# Altium PCB VerticalFET.PcbDoc
Units mil, origin at the board's own origin, x right, y up, seen from the top; angles counter-clockwise.
Board outline 556.88 x 825 mil, 4 copper layers (L1, GND, PWR, L2), stack 23.756 mil thick; 18 components, 10 nets, 63 pads, 39 vias.
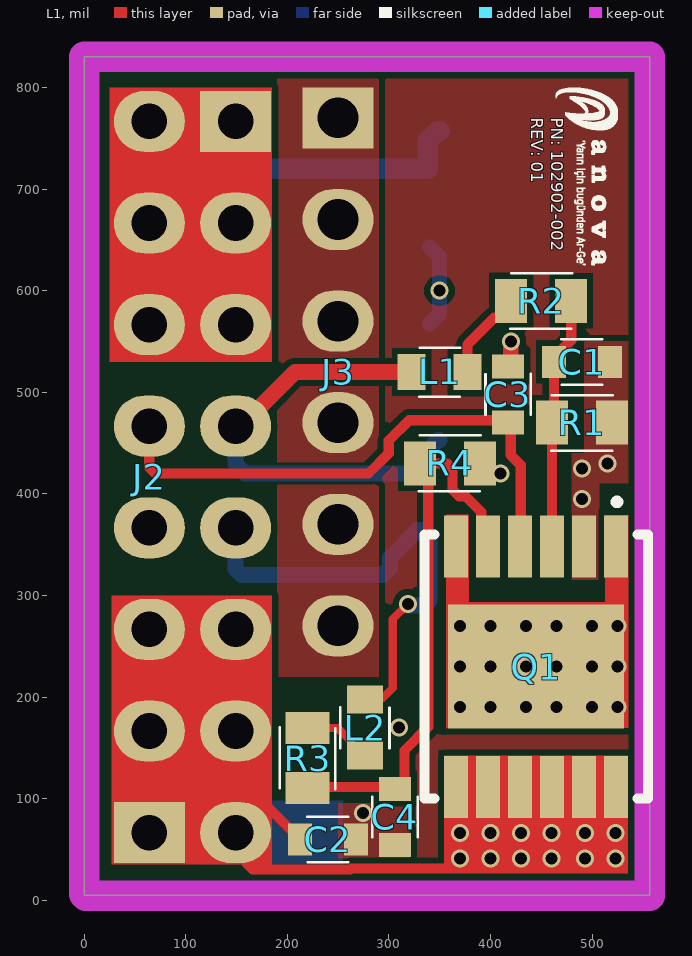
[diagram p0: L1 view]
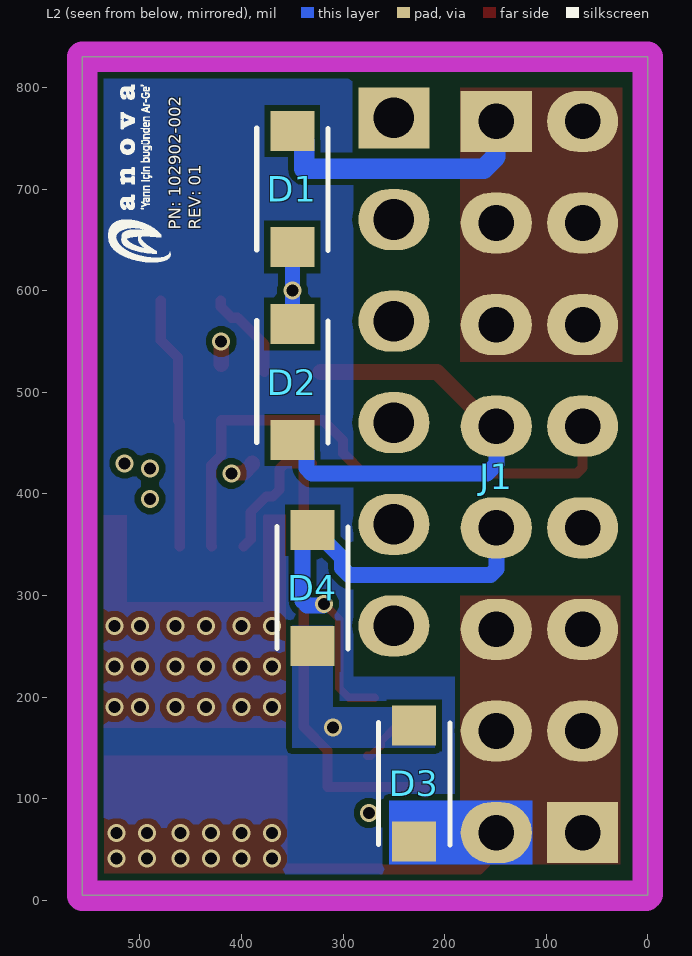
[diagram p1: L2 view, seen from below]
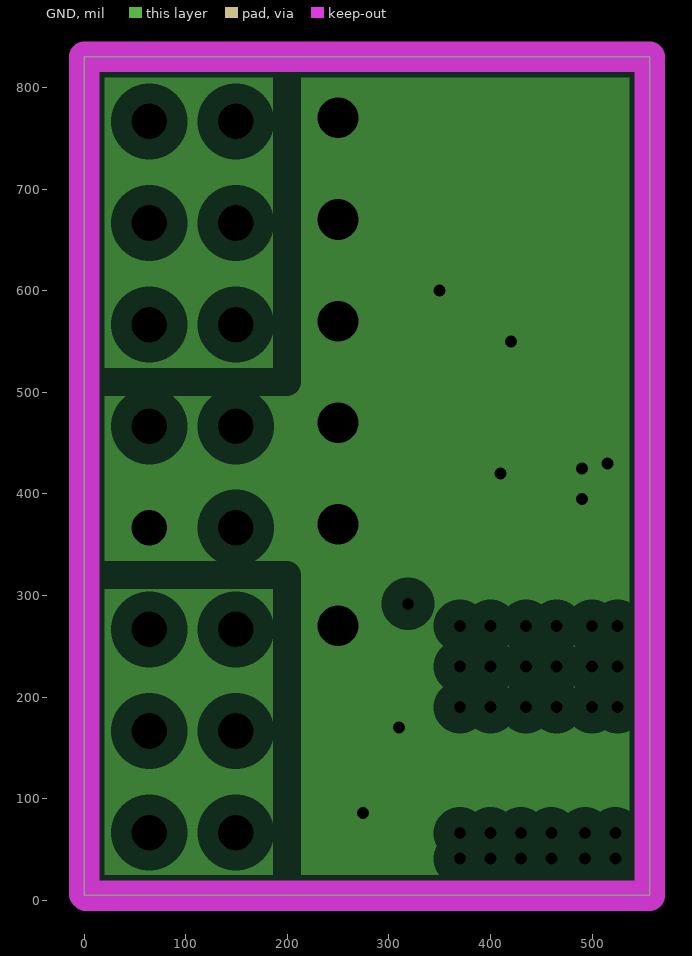
[diagram p2: GND, clearances drawn from the general rule]
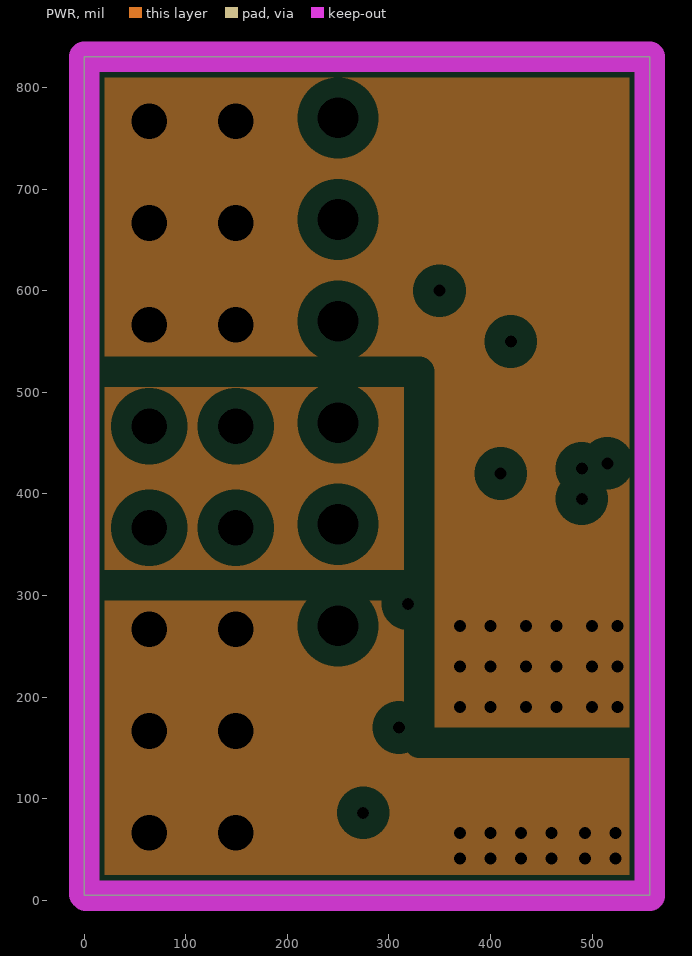
[diagram p3: PWR, clearances drawn from the general rule]
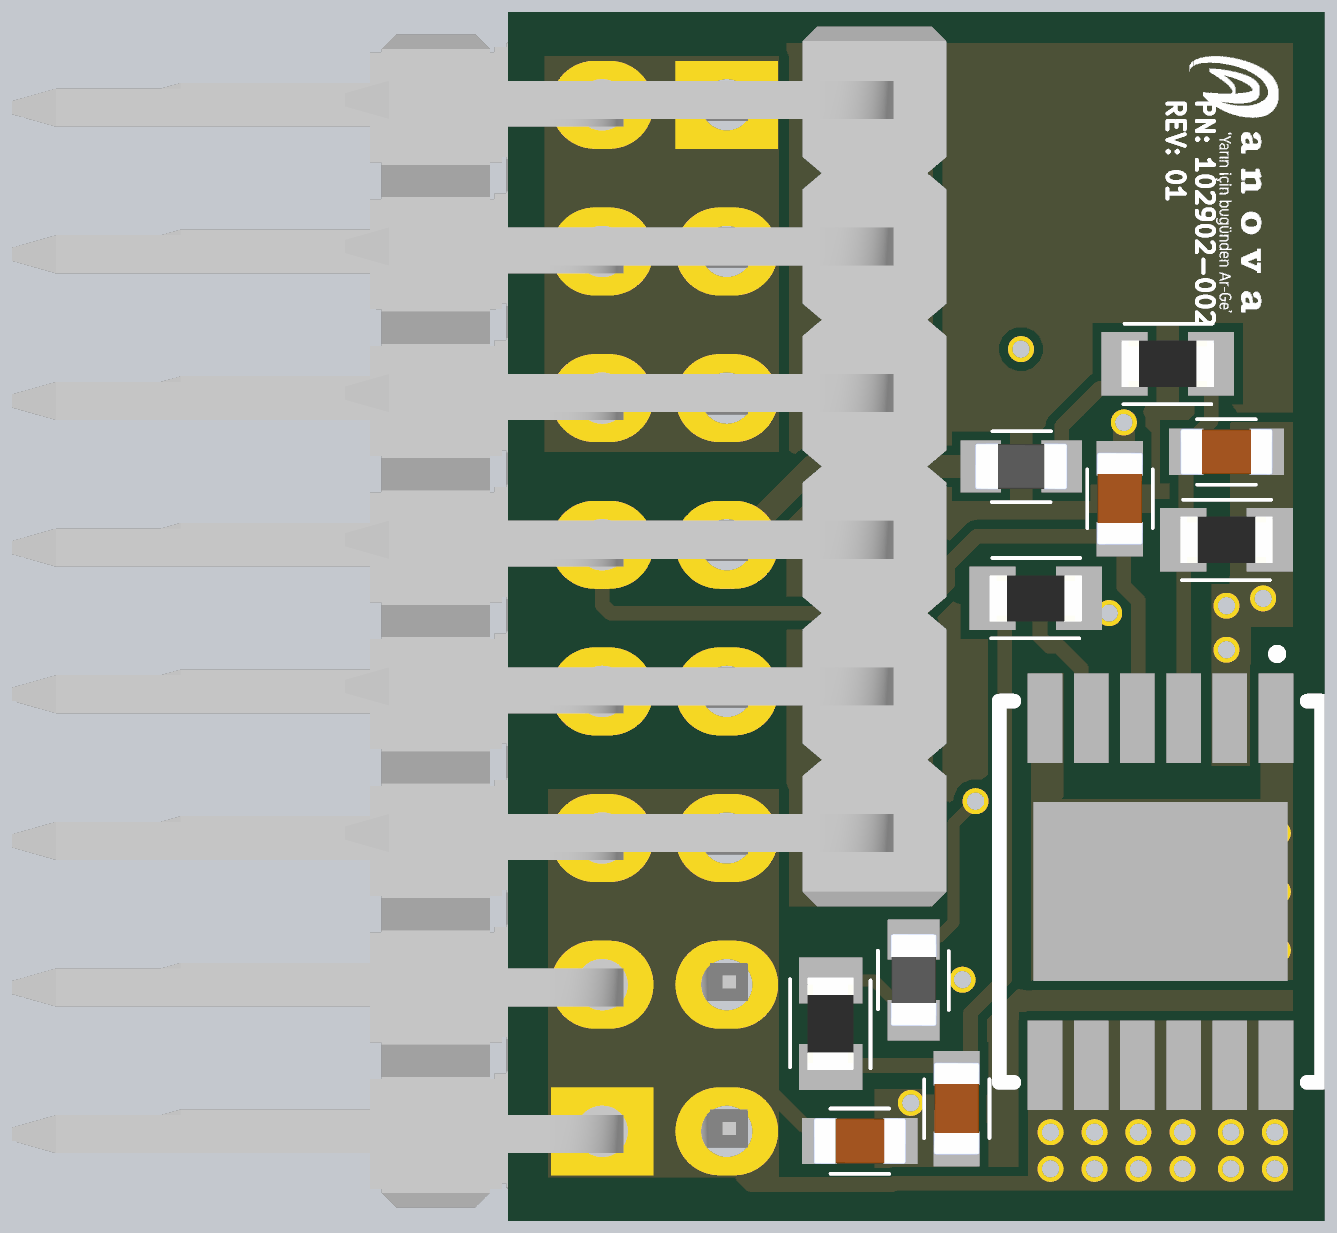
[diagram p4: 3D render of the assembled board from above, using the file's embedded part models]
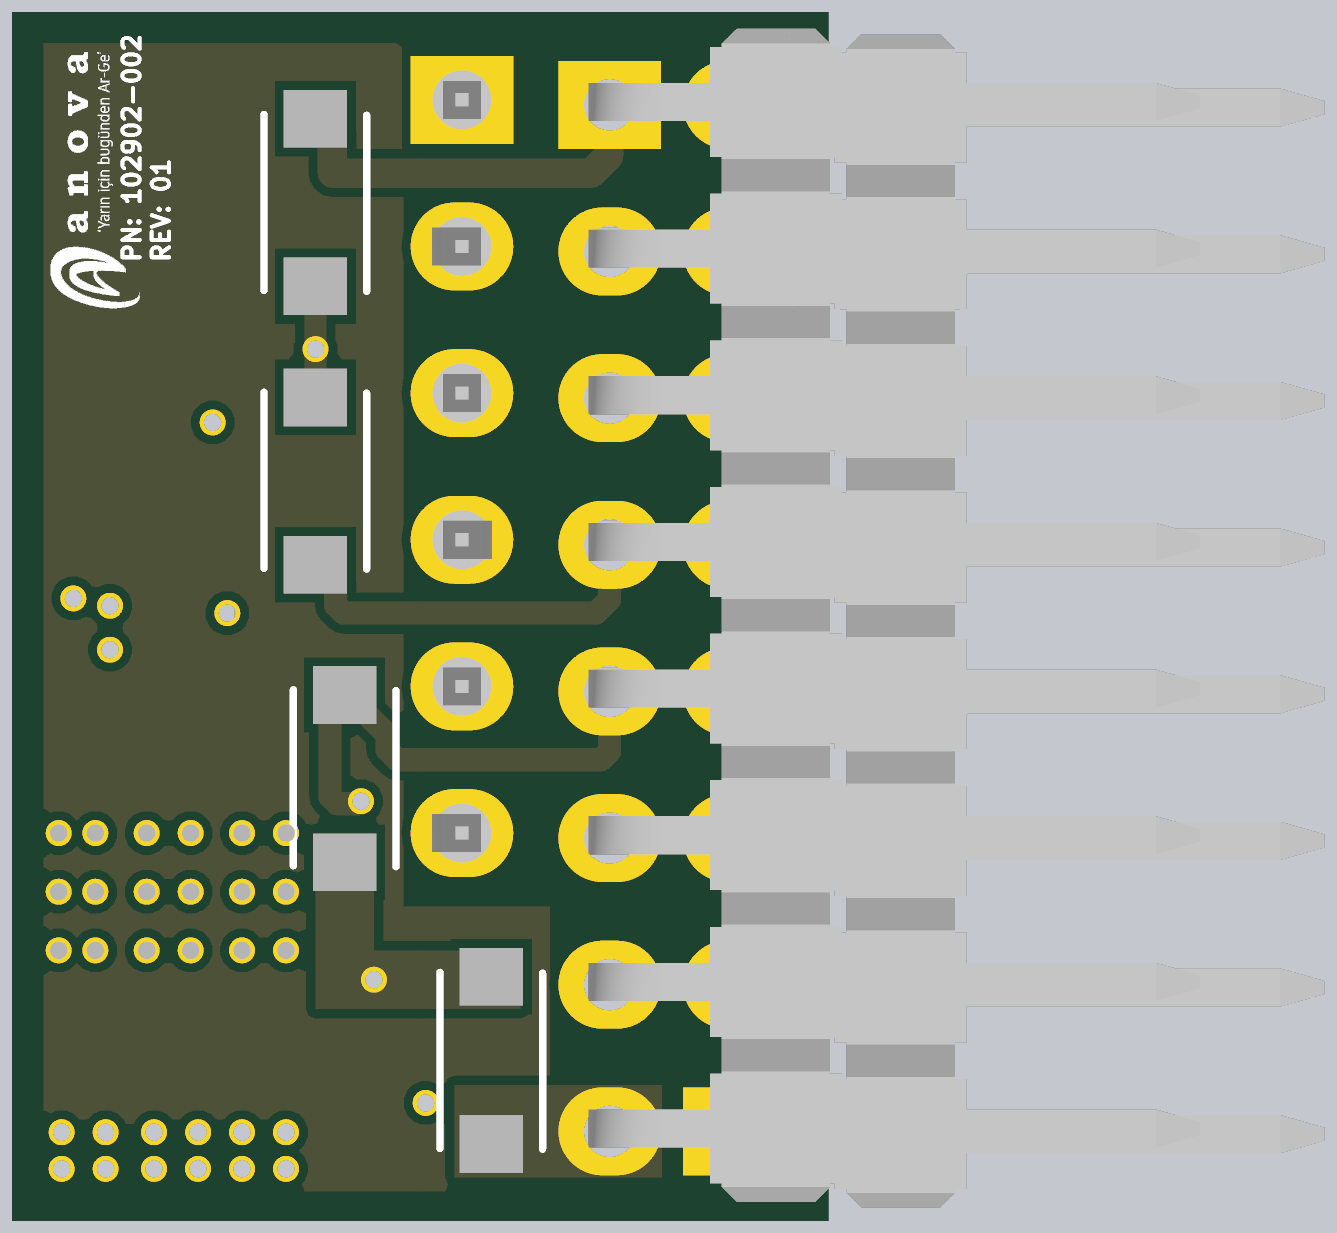
[diagram p5: 3D render of the assembled board from below, using the file's embedded part models]

## Layer stack, top to bottom
Top Solder: solder mask 0.4, Solder Resist, Dk 3.5
L1: signal copper 1.4
Prepreg1: prepreg 2.8, PP-006, Dk 4.1
GND: plane copper 1.378, net GND
Dielectric 1: dielectric 12.6, FR-4, Dk 4.8
PWR: plane copper 1.378, net (Multiple Nets)
Dielectric 3: prepreg 2.8, PP-006, Dk 4.1
L2: signal copper 1.4
Bottom Solder: solder mask 0.4, Solder Resist, Dk 3.5

## Board outline
0,5 556.88,5 556.88,830 0,830

## Design rules (kind name [scope] priority, off if disabled: settings)
Clearance [All] p1: gap=6 ignorepadtopadclearanceinfootprint=FALSE
ComponentClearance ComponentClearance_1 [InComponent('J1') vs InComponent('J2')] p1: gap=-2 collisioncheckmode=3 verticalgap=100000 showdistances=FALSE
ComponentClearance [All] p2: gap=10 collisioncheckmode=3 verticalgap=10 showdistances=FALSE
DiffPairsRouting [All] p1: maxlimit=10 minlimit=10 mostfreqgap=10 toplayer_minwidth=6 toplayer_maxwidth=15 toplayer_prefwidth=15 bottomlayer_minwidth=6 bottomlayer_maxwidth=15 bottomlayer_prefwidth=15 maxuncoupledlength=500
HoleSize [All] p1: absolutevalues=TRUE maxlimit=100 minlimit=0 maxpercent=80.000 minpercent=20.000
MinimumSolderMaskSliver [All] p1: minsoldermaskwidth=0
PlaneClearance [All] p1: clearance=20
PlaneConnect [All] p1: planeconnectstyle=Direct reliefexpansion=20 reliefentries=4 reliefconductorwidth=10 reliefairgap=10
PolygonConnect [All] p1: connectstyle=Direct reliefconductorwidth=10 reliefentries=4 polygonreliefangle="90 Angle" airgapwidth=10
RoutingVias [All] p1: holewidth=11.81 width=17.72 viastyle="Through Hole" minholewidth=11.81 minwidth=17.72 maxholewidth=11.81 maxwidth=17.72
SilkToSilkClearance [All] p1: silktosilkclearance=1
SilkToSolderMaskClearance [IsPad] p1: minsilkscreentomaskgap=2 clearancetoexposedcopper=TRUE
SolderMaskExpansion [All] p1: expansion=0 istentingtop=FALSE
UnRoutedNet [All] p1: checkbadconnections=TRUE
Width [All] p1: maxlimit=30 minlimit=7 preferedwidth=8 minimp=50.000000 maximp=50.000000 favimp=50.000000
21 further rules are at their usual default settings.

## Components (designator, comment, footprint, x,y, rotation, side; value= is the part's Value field where it differs from the comment)
C1 "100n" CAP-0603 490,530 r0 top
C2 "100n" CAP-0603 240,60 r0 top
C3 "100n" CAP-0603 417.26,498.02 r90 top
C4 "100n" CAP-0603 305.97,82.06 r90 top
D1 "TVS-DIODE-48.4VC" SOD-123FL 350,700 r270 bottom
D2 "TVS-DIODE-5VC" SOD-123FL 350,510 r90 bottom
D3 "TVS-DIODE-48.4VC" SOD-123FL 230,115 r270 bottom
D4 "TVS-DIODE-5VC" SOD-123FL 330,307.09 r90 bottom
J1 "HEADER-1" HEEADER-1 149.25,416.59 r270 bottom
J2 "HEADER-1" HEEADER-1 64.25,416.59 r90 top
J3 "022287060" 022287060 250,520 r270 top
L1 "Ferrite-Bead" FERITTE-BEAD 350,520 r0 top
L2 "Ferrite-Bead" FERITTE-BEAD 276.67,169.83 r270 top
Q1 "VN5016AJ-E" POWERSSO-12 445,230 r180 top
R1 "10K" RES-0603 490,470 r0 top
R2 "1K" RES-0603 450,590 r0 top
R3 "1K" RES-0603 220,140 r270 top
R4 "10K" RES-0603 360,430 r180 top

## Footprints (in the part's own frame and the unit in brackets; to place one, negate y for a bottom-side part, rotate by r counter-clockwise, add the part's x,y. Pads: shape width x height; smd on the part's side, far side on the other; paste and mask are expansions set on the pad)
022287060 [mil] "j?"
  rect 60x70 hole 40: 1(-250,0)
  oval 60x70 hole 40: 2(-150,0) 3(-50,0) 4(50,0) 5(150,0) 6(250,0)
  body extent -300,-361 300,49, height 174
CAP-0603 [mm] "10uF"
  rect 0.6x0.8 smd: 1(-0.7,0) 2(0.7,0)
  silkscreen extent -0.51,-0.57 0.51,0.56, body extent -0.8,-0.4 0.8,0.4, height 1.01
FERITTE-BEAD [mm]
  rect 0.7x0.9 smd: 1(-0.7,0) 2(0.7,0)
  silkscreen extent -0.51,-0.62 0.52,0.61, body extent -0.8,-0.4 0.8,0.4, height 0.95
HEEADER-1 [mil]
  rect 60x70 hole 35: 1(-350,0)
  oval 60x70 hole 35: 2(-250,0) 3(-150,0) 4(-50,0) 5(50,0) 6(150,0) 7(250,0) 8(350,0)
  body extent -402,-15 398,402, height 128
POWERSSO-12 [mm]
  rect 4.4x3.1 smd: 0(0,0)
  rect 0.6x1.55 smd: 1(-2,-3.007) 2(-1.2,-3.007) 3(-0.4,-3.007) 4(0.4,-3.007) 5(1.2,-3.007) 6(2,-3.007) 7(2,3.007) 8(1.2,3.007) 9(0.4,3.007) 10(-0.4,3.007) 11(-1.2,3.007) 12(-2,3.007)
  silkscreen extent -2.79,-4.15 2.79,3.3, body extent -2.5,-3.1 2.5,3.1, height 1.64
RES-0603 [mm] "Resistors"
  rect 0.8x1.1 smd: 1(-0.75,0) 2(0.75,0)
  silkscreen extent -0.77,-0.7 0.77,0.69, body extent -0.8,-0.4 0.8,0.4, height 0.46
SOD-123FL [mm]
  rect 1x1.1 smd: 1(-1.45,0) 2(1.45,0)
  silkscreen extent -1.52,-0.89 1.54,0.89, body extent -1.79,-0.82 1.79,0.83, height 0.95

## Part data
C1 C2 C3 C4: library part CAP-100N-0603, "Cap Ceramic 0.1uF 50V X7R 10% SMD 0603 125C Paper T/R", Capacitance=100nF, Case Code (Metric)=1608, Case Code (Imperial)=0603, Dielectric=X7R, Manufacturer=Murata, Manufacturer Part Number=GCM188R71H104KA57D, Max Operating Temperature=125°C, Min Operating Temperature=-55°C, Package Quantity=1, Ratings=AEC-Q200, Supplier Part Number 1=490-4779-1-ND, Tolerance=10%, Voltage=50V, Case/Package=0603, Category="Ceramic Capacitors", ComponentLink1Description=https://datasheet.ciiva.com/16624/product-16624562.pdf?src-supplier=Avnet+Europe, ComponentLink1URL=https://datasheet.ciiva.com/16624/product-16624562.pdf?src-supplier=Avnet+Europe, ComponentLink2Description=https://datasheet.ciiva.com/133/product-133574.pdf?src-supplier=Digi-Key, ComponentLink2URL=https://datasheet.ciiva.com/133/product-133574.pdf?src-supplier=Digi-Key, ComponentLink3Description=https://datasheet.ciiva.com/133/product-133575.pdf?src-supplier=Digi-Key, ComponentLink3URL=https://datasheet.ciiva.com/133/product-133575.pdf?src-supplier=Digi-Key, ComponentLink4Description=https://datasheet.ciiva.com/18183/getdatasheetpartid-98693-18183626.pdf?src-supplier=Verical, ComponentLink4URL=https://datasheet.ciiva.com/18183/getdatasheetpartid-98693-18183626.pdf?src-supplier=Verical, ComponentLink5Description=https://datasheet.ciiva.com/11786/0900766b80ef92d0-11786863.pdf?src-supplier=RSComponents, ComponentLink5URL=https://datasheet.ciiva.com/11786/0900766b80ef92d0-11786863.pdf?src-supplier=RSComponents, ComponentLink6Description=https://datasheet.ciiva.com/133/product-133573.pdf?src-supplier=Digi-Key, ComponentLink6URL=https://datasheet.ciiva.com/133/product-133573.pdf?src-supplier=Digi-Key, ComponentLink7Description=https://datasheet.ciiva.com/2989/product-2989242.pdf?src-supplier=Avnet, ComponentLink7URL=https://datasheet.ciiva.com/2989/product-2989242.pdf?src-supplier=Avnet, ComponentLink8Description=https://datasheet.ciiva.com/16497/product-16497247.pdf?src-supplier=Future+Electronics, ComponentLink8URL=https://datasheet.ciiva.com/16497/product-16497247.pdf?src-supplier=Future+Electronics, Construction=Flat, Depth=0.8mm, Height=0.8mm, Lead Free="Lead Free", Length=1.6mm, Mount="Surface Mount", Packaging="Tape and Reel", Pricing 1="1=0.11000, 10=0.07900, 50=0.04300, 100=0.03510, 500=0.02510, 1000=0.01972 (USD)", Radiation Hardening=No, REACH SVHC="No SVHC", RoHS=Yes, RoHS Compliant=Yes, Series=GCM, Stock 1=2424921, Supplier 1=Digi-Key, Termination=SMD/SMT, Thickness=0.035inch, Voltage Rating=50V, Voltage Rating (DC)=50V, Width=0.031inch
D1 D3: "SMF4L30CA", Manufacturer=Littelfuse, Supplier Part Number 1=18-SMF4L30CACT-ND, Category="TVS Diodes", Manufacturer Part Number=SMF4L30CA, Pricing 1="1=0.46000, 10=0.37300, 100=0.25400, 500=0.19052, 1000=0.14288 (USD)", RoHS=Yes, Stock 1=1501, Supplier 1=Digi-Key
D2 D4: "PESD2V8R1BSF - Ultra low capacitance bidirectional ESD protection diode", Manufacturer=Nexperia, Manufacturer Part Number=PESD2V8R1BSFYL, Supplier Part Number 1=1727-PESD2V8R1BSFYLCT-ND, Category="TVS Diodes", Pricing 1="1=0.44000, 10=0.32400, 100=0.18340, 500=0.12144, 1000=0.09310, 2000=0.08096 (USD)", RoHS=No, Stock 1=12322, Supplier 1=Digi-Key
J1 J2: "CONN HEADER R/A 8POS 2.54MM", Color=Black, Contact Resistance=20mR, Manufacturer=Molex, Manufacturer Part Number=0022288080, Max Operating Temperature=75°C, Max Voltage Rating (AC)=250V, Min Operating Temperature=0°C, Package Quantity=1, Supplier Part Number 1=WM50013-08-ND, Category="Headers and Wire Housings", ComponentLink1Description=https://datasheet.ciiva.com/6839/022289022-sd-6839452.pdf?src-supplier=Digi-Key, ComponentLink1URL=https://datasheet.ciiva.com/6839/022289022-sd-6839452.pdf?src-supplier=Digi-Key, ComponentLink2Description=https://datasheet.ciiva.com/10085/0022288080-pcb-headers-10085395.pdf?src-supplier=Avnet, ComponentLink2URL=https://datasheet.ciiva.com/10085/0022288080-pcb-headers-10085395.pdf?src-supplier=Avnet, ComponentLink3Description=https://datasheet.ciiva.com/6889/022288080-sd-6889612.pdf?src-supplier=Digi-Key, ComponentLink3URL=https://datasheet.ciiva.com/6889/022288080-sd-6889612.pdf?src-supplier=Digi-Key, Connector Type="Male Pin", Contact Material=Brass, Contact Mating Length=0.244inch, Contact Plating=Tin, Contact Type="Male Pin", Depth=10.27mm, Gender=Male, Housing Color=Black, Housing Material=Thermoplastic, Length=20.32mm, Mount="Through Hole", Number of Contacts=8, Number of Positions=8, Number of Rows=1, Orientation="Right Angle", Packaging=Bulk, Pitch=2.54mm, Pricing 1="1=0.49000, 10=0.41700, 100=0.32420 (USD)", RoHS=Yes, RoHS Compliant=Yes, Series="KK® 42377", Stock 1=62, Supplier 1=Digi-Key, Termination=Solder
J3: "HEADER, 6WAY", Current Rating=4A, Flammability Rating="UL94 V-0", Manufacturer=Molex, Manufacturer Part Number=22-28-7060, Package Quantity=1500, Voltage Rating=250V, Category="Headers and Wire Housings", ComponentLink1Description=https://datasheet.ciiva.com/13555/0022287060-pcb-headers-158998-13555865.pdf?src-supplier=Mouser, ComponentLink1URL=https://datasheet.ciiva.com/13555/0022287060-pcb-headers-158998-13555865.pdf?src-supplier=Mouser, Contact Material=Brass, Contact Plating=Tin, ELV=Compliant, Gender=Male, Glow Wire Compliant=Non-compliant, Housing Material=Thermoplastic, Material=Brass, Number of Circuits=6, Number of Contacts=6, Number of Positions=6, Number of Rows=1, Orientation="Right Angle", Packaging=Bulk, Pitch=2.54mm, Pricing 1="12000=0.25530, 13000=0.25160, 25000=0.24388, 60000=0.24024, 120000=0.23296, 600000=0.22932, 1200000=0.22659 (USD)", RoHS=Yes, RoHS Compliant=Yes, Series=42376, Stock 1=3700, Supplier 1=Avnet, Supplier Part Number 1=22-28-7060, Termination="Through Hole"
L1 L2: "FERRITE BEAD 1 KOHM 0603 1LN", Case Code (Metric)=1608, Case Code (Imperial)=0603, Current Rating=200mA, DC Resistance (DCR)=800mR, Manufacturer=Murata, Manufacturer Part Number=BLM18RK102SN1D, Max Operating Temperature=125°C, Min Operating Temperature=-55°C, Package Quantity=1, Supplier Part Number 1=490-5228-1-ND, Test Frequency=100MHz, Tolerance=25%, Case/Package=0603, Category="Ferrite Beads and Chips", ComponentLink1Description=https://datasheet.ciiva.com/6212/l0110s0100blm18r-6212512.pdf?src-supplier=Digi-Key, ComponentLink1URL=https://datasheet.ciiva.com/6212/l0110s0100blm18r-6212512.pdf?src-supplier=Digi-Key, ComponentLink2Description=https://datasheet.ciiva.com/19460/1845081-19460235.pdf?src-supplier=Jameco, ComponentLink2URL=https://datasheet.ciiva.com/19460/1845081-19460235.pdf?src-supplier=Jameco, ComponentLink3Description=https://datasheet.ciiva.com/41449/001171720-da-01-en-chip-drossel0603-1000r-200ma-1-6x0-8mm-41449349.pdf?src-supplier=Conrad, ComponentLink3URL=https://datasheet.ciiva.com/41449/001171720-da-01-en-chip-drossel0603-1000r-200ma-1-6x0-8mm-41449349.pdf?src-supplier=Conrad, ComponentLink4Description=https://datasheet.ciiva.com/41449/001172307-da-01-en-drossel-0603-1000r-1-6x0-8mm-4000st-41449670.pdf?src-supplier=Conrad, ComponentLink4URL=https://datasheet.ciiva.com/41449/001172307-da-01-en-drossel-0603-1000r-1-6x0-8mm-4000st-41449670.pdf?src-supplier=Conrad, ComponentLink5Description=https://datasheet.ciiva.com/3067/c31e-3067187.pdf?src-supplier=Avnet, ComponentLink5URL=https://datasheet.ciiva.com/3067/c31e-3067187.pdf?src-supplier=Avnet, ComponentLink6Description=https://datasheet.ciiva.com/3067/c31e-3067129.pdf?src-supplier=Avnet, ComponentLink6URL=https://datasheet.ciiva.com/3067/c31e-3067129.pdf?src-supplier=Avnet, ComponentLink7Description=https://datasheet.ciiva.com/8021/5149-8021501.pdf?src-supplier=Element14, ComponentLink7URL=https://datasheet.ciiva.com/8021/5149-8021501.pdf?src-supplier=Element14, ComponentLink8Description=https://datasheet.ciiva.com/6212/l0110e-6212510.pdf?src-supplier=Digi-Key, ComponentLink8URL=https://datasheet.ciiva.com/6212/l0110e-6212510.pdf?src-supplier=Digi-Key, ComponentLink9Description=https://datasheet.ciiva.com/8021/5149-8021502.pdf?src-supplier=Element14, ComponentLink9URL=https://datasheet.ciiva.com/8021/5149-8021502.pdf?src-supplier=Element14, ComponentLink10Description=https://datasheet.ciiva.com/6212/l0110e-6212511.pdf?src-supplier=Digi-Key, ComponentLink10URL=https://datasheet.ciiva.com/6212/l0110e-6212511.pdf?src-supplier=Digi-Key, Contact Plating=Tin,Matte, Core Material=Ferrite, DC Resistance-Max=800mR, Depth=0.8mm, Height=0.8mm, Lead Free="Lead Free", Length=1.6mm, Material=Steel,Ferrite, Max Current Rating=200mA, Max DC Current=200mA, Number of Circuits=1, Number of Lines=1, Number of Pins=2, Packaging="Tape and Reel", Pricing 1="1=0.10000, 10=0.08200, 25=0.07440, 50=0.05440, 100=0.04700, 250=0.03712, 500=0.03136, 1000=0.02640 (USD)", REACH SVHC="No SVHC", Resistance=800mR, RoHS=Yes, RoHS Compliant=Yes, Series=BLM18R, Shielding=Unshielded, Stock 1=68861, Supplier 1=Digi-Key, Termination=Flat, Width=0.8mm, Impedance=1kR
Q1: "STMicroelevtronics_VIPower_MO_5"
R1 R4: library part RES-10K-0603, "Resistors-10KOhm"
R2 R3: library part RES-1K-0603, "RES SMD 1K OHM 0.5% 1/10W 0603", Case/Package=0603, Manufacturer="Stackpole Electronics", Manufacturer Part Number=RNCF0603DTE1K00, Max Operating Temperature=155°C, Max Power Dissipation=100mW, Min Operating Temperature=-55°C, Package Quantity=5000, Resistance=1kR, Resistor Type="Thin Film", Supplier Part Number 1=RNCF0603DTE1K00CT-ND, Temperature Coefficient=25ppm/°C, Tolerance=0.5%, Category="Chip SMD Resistors", ComponentLink1Description=https://www.seielect.com/Catalog/SEI-rncf.pdf?src-supplier=Avnet, ComponentLink1URL=https://www.seielect.com/Catalog/SEI-rncf.pdf?src-supplier=Avnet, ComponentLink2Description=https://www.seielect.com/Catalog/SEI-RNCF.pdf?src-supplier=Digi-Key, ComponentLink2URL=https://www.seielect.com/Catalog/SEI-RNCF.pdf?src-supplier=Digi-Key, Contact Plating=Tin,Matte, Features="Moisture Resistant", Height=0.022inch, Length=0.063inch, Mount="Surface Mount", Number of Terminations=2, Packaging="Tape and Reel", Pricing 1="1=0.13000, 10=0.11000, 25=0.08000, 50=0.05800, 100=0.04300, 250=0.03300, 500=0.02600, 1000=0.01800 (USD)", Radiation Hardening=No, RoHS=Yes, RoHS Compliant=Yes, Series=RNCF, Stock 1=522, Supplier 1=Digi-Key, Width=0.031inch

## Via types
v1: diameter 17.72, hole 11.81, L1 to L2, 39 vias

## Nets (pads, with @x,y where several pads share a name; then routed paths per layer and width w, separated by ;. In a path a pad name is that pad's centre, name@x,y a point inside that pad or via, vN(x,y) a via of type N, cw(c..) or ccw(c..) an arc to the next point about the centre after c; other vN are vias at no path point)
CS_DIS: D4.2 J1.5 L2.1 | length 487.6
  L1 w7.99: L2.1@268.85,199.26 294.17,199.26 303.85,208.94 303.85,276.7 v1(318.85,291.7)
  L1 w10: J1.5 J1.5@165.1,366.59
  L2 w15.75: J1.5 149.25,325.86 155.11,320 294.14,320 301.21,327.07 301.21,337.35 328.03,364.17 D4.2 340,354.17 340,294.68 335.32,290 v1@320,290
CURR_SENS: C3.1 J2.5 Q1.4 | length 556.3
  L1 w10: J2.5 64.25,425.86 70.11,420 280,420 299.98,439.98 299.98,452.46 319.96,472.44 420,472.44 420,438.08 429.86,428.23 429.86,348.99 Q1.4
GND: C1.2 C2.2 C3.2 C4.1 D1.2 D2.2 D3.1 D4.1 J2.4 J3.1 J3.2 J3.3 J3.4 J3.5 J3.6 Q1.2 R1.2 R4.1 | length 141.9
  L1 w10: J2.4@50,365 J2.4@55,365
  L1 w15: R4.1 389.53,428.77 397.78,420.52 409.48,420.52 v1(410,420) ; C3.2@420,527.56 v1(420,550)
  L2 w10: J2.4@50,365 J2.4@55,365
  L2 w15: D2.2@340,567.09 349.93,577.02 349.93,599.93 v1(349.87,600) ; D1.2@340,642.91 349.93,632.98 349.93,600.07 v1@350,600
  other v1: 274.75,85.97 310,170 490,395 490,425 515,430
INP: D2.1 J1.4 L1.1 | length 460.1
  L1 w15.75: J1.4 154.25,466.59 207.66,520 L1.1
  L2 w15.75: J1.4 149.25,429.22 158.48,420 330.78,420 336.22,425.45 336.22,441.1 348.03,452.91 D2.1
NetC1_1: C1.1 Q1.3 R1.1 R2.2 | length 249.6
  L1 w10: Q1.3 460.75,469.72 R1.1 462.44,471.97 C1.1 462.44,533.94 479.53,551.02 R2.2
NetC4_2: C4.2 Q1.5 R3.2 R4.2 | length 556.2
  L1 w10: R3.2 221.03,111.5 315.43,111.5 315.43,147.35 338.71,170.62 338.71,421.77 R4.2 356.92,430 362.78,424.14 362.78,403.79 369.22,397.35 375.69,397.35 390.94,382.09 390.94,355.2 Q1.5
NetL1_2: L1.2 R2.1 | length 91.2
  L1 w10: L1.2 377.56,547.09 403.82,573.35 409.72,573.35 420.47,584.09 R2.1
NetL2_2: L2.2 R3.1 | length 70.3
  L1 w7.99: R3.1 249.42,169.53 262.95,155.99 262.95,152.05 272.74,142.27 L2.2
VIN: D1.1 J1.1 J1.2 J1.3 J2.6 J2.7 J2.8 Q1.0 Q1.1 Q1.6 | length 271.4
  L2 w20: J1.1 150,765.85 150,731.72 161.72,720 338.28,720 338.35,720.06 338.35,747.4 348.03,757.09 D1.1
  other v1: 370,190 400,190 435,190 465,190 500,190 525,190 370,230 400,230 435,230 465,230 500,230 525,230 370,270 400,270 435,270 465,270 500,270 525,270
VOUT: C2.1 D3.2 J1.6 J1.7 J1.8 J2.1 J2.2 J2.3 Q1.7 Q1.8 Q1.9 Q1.10 Q1.11 Q1.12 | length 386.8
  L1 w10: J1.8 160,55.85 160,36.16 165.86,30.3 262.27,30.3 263.11,31.13 360.13,31.13 v1(370,41) ; J1.7 149.25,123.19 201.69,70.75 205.63,70.75 212.44,63.94 C2.1
  other v1: 400,41 430,41 460,41 493,41 523,41 370,66 400,66 429.9,66 460,66 493,66 523,66

## Polygon pours and split planes (outlines as drawn)
no net on L2 "NONET_L04_P010" (solid, pour order 10): 540,810 290,810 290,220 190,220 190,20 540,20
GND on L2 "GND_L04_P007" (solid, pour order 7): 210,190 210,150 350,150 350,270 310,270 310,190
no net on L1 "NONET_L01_P009" (solid, pour order 9): 540,810 540,808.59 538.59,808.59 289.62,808.59 289.62,220.38 290,220 191.49,220 191.49,21.49 190,20 540,20
GND on L1 "GND_L01_P008" (solid, pour order 8): 320,95.49 250,95.49 250,40 320,40
GND on L1 "GND_L01_P004" (solid, pour order 4): 291.55,808.59 290.14,810 190,810 190,220 290,220 290,807.67 291.55,809.21
GND on L1 "GND_L01_P002" (solid, pour order 2): 479.06,315.68 506.88,315.68 506.88,410.17 506.64,410.41 537.34,410.41 537.57,410.17 537.57,549.88 537.15,550.3 493.27,550.3 492.4,549.42 492.4,445.58 492.1,445.28 492.1,439.73 479.82,439.73 479.82,315.88 479.5,315.57
VIN on PWR (split plane): 536.78,170.07 345.07,170.07 345.07,310 345.07,520 344.78,522.94 343.93,525.77 342.53,528.37 340.66,530.66 338.37,532.53 335.77,533.93 332.94,534.78 330,535.07 20.1,535.07 20.1,809.9 536.78,809.9
VOUT on PWR (split plane): 314.93,155 315.22,152.06 316.07,149.23 317.47,146.63 319.34,144.34 321.63,142.47 324.23,141.07 327.06,140.22 330,139.93 536.78,139.93 536.78,25.1 20.1,25.1 20.1,294.93 314.93,294.93
no net on PWR (split plane): 314.93,325.07 20.1,325.07 20.1,504.93 314.93,504.93
GND on GND (split plane): 536.78,25.1 213.85,25.1 213.85,320 213.58,322.7 212.79,325.3 211.51,327.69 209.79,329.79 207.69,331.51 205.3,332.79 202.7,333.58 200,333.85 20.1,333.85 20.1,496.15 200,496.15 202.7,496.42 205.3,497.21 207.69,498.49 209.79,500.21 211.51,502.31 212.79,504.7 213.58,507.3 213.85,510 213.85,809.9 536.78,809.9
no net on GND (split plane): 186.15,25.1 20.1,25.1 20.1,306.15 186.15,306.15
no net on GND (split plane): 186.15,523.85 20.1,523.85 20.1,809.9 186.15,809.9

## Keep-outs
Keep-Out Layer:
  lines w30: 0,5.97 1.67,4.3 556.88,4.3 556.88,830 0,830 0,5.97

## Other copper
L1:
  rectangle net VOUT: 354.52,26.13 535.3,142.28
  rectangle net VOUT: 27.19,35 185,300
  rectangle net VIN: 25,530 185,800
  region net VIN: 535.43,378.98 535.43,169.84 357.55,169.84 356.64,168.93 356.64,378.98 356.34,379.29 378.19,379.29 378.8,378.68 378.8,294.29 377.89,293.38 513.14,293.38 513.14,378.98
L2:
  rectangle net VOUT: 113.66,35 255,98.25
GND (plane layer: these items are gaps in the copper):
  lines w27.56: 0,320 200,320 200,0 ; 0,510 200,510 200,820
PWR (plane layer: these items are gaps in the copper):
  lines w30: -5,520 330,520 330,310 ; 0,310 330,310 ; 560,155 330,155 330,310

## Silkscreen, mask and mechanical layers (free items; w line width, h text height)
Top Overlay:
  drawing of 3514 lines, arcs and shapes, not listed
  text "REV: 01" at 440,770 h11.81 r270
  text "PN: 102902-002" at 460,770 h11.81 r270
Bottom Overlay:
  drawing of 3514 lines, arcs and shapes, not listed
  text "REV: 01" at 440,660 h11.81 r270
  text "PN: 102902-002" at 460,660 h11.81 r270